# Altium PCB 装甲模块PCB.PcbDoc
Units mil, origin at the board's own origin, x right, y up, seen from the top; angles counter-clockwise.
Board outline 2335.03 x 900.03 mil, 2 copper layers (Top Layer, Bottom Layer); 36 components, 25 nets, 165 pads, 31 vias.
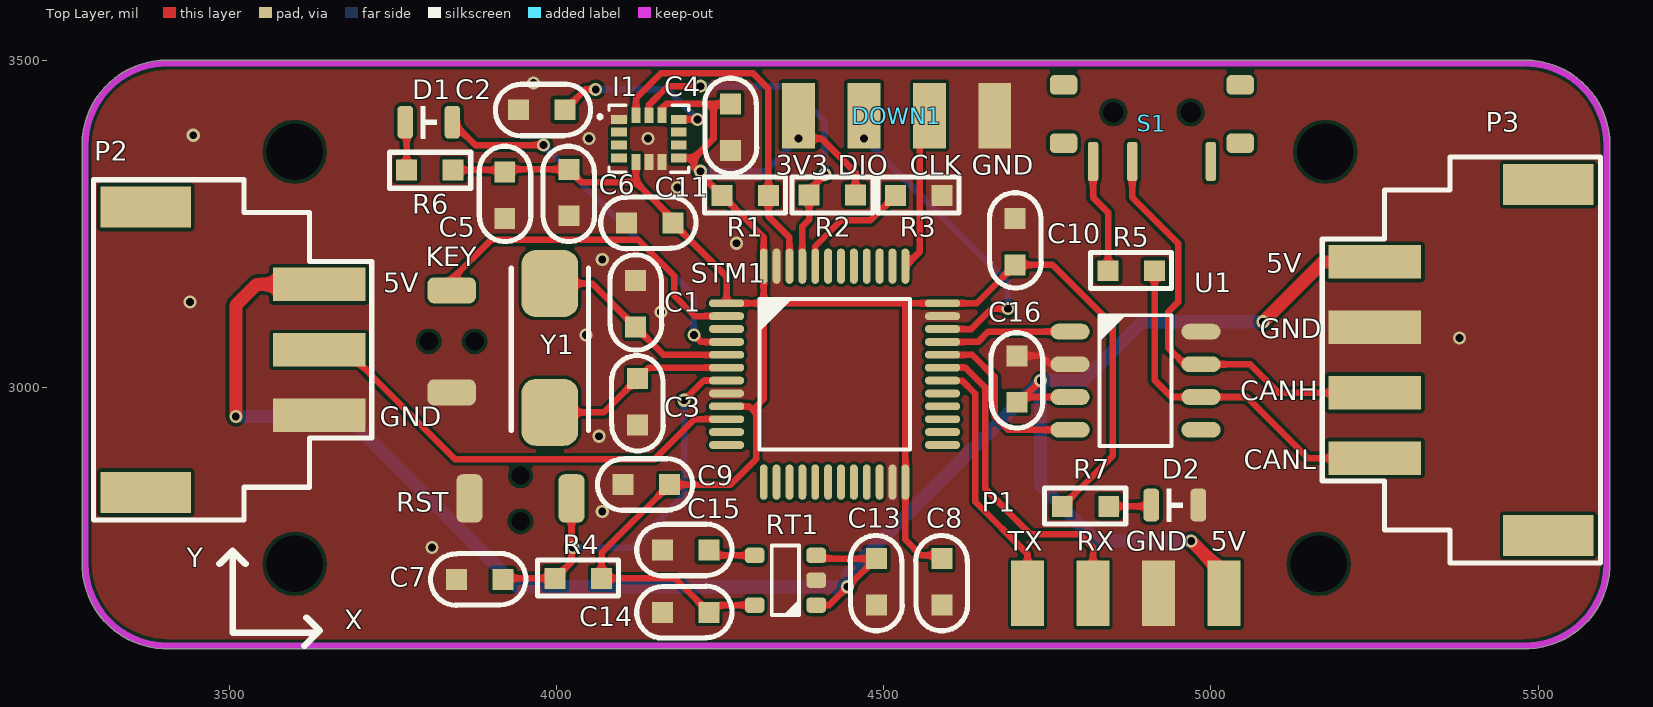
[diagram p0: Top Layer view]
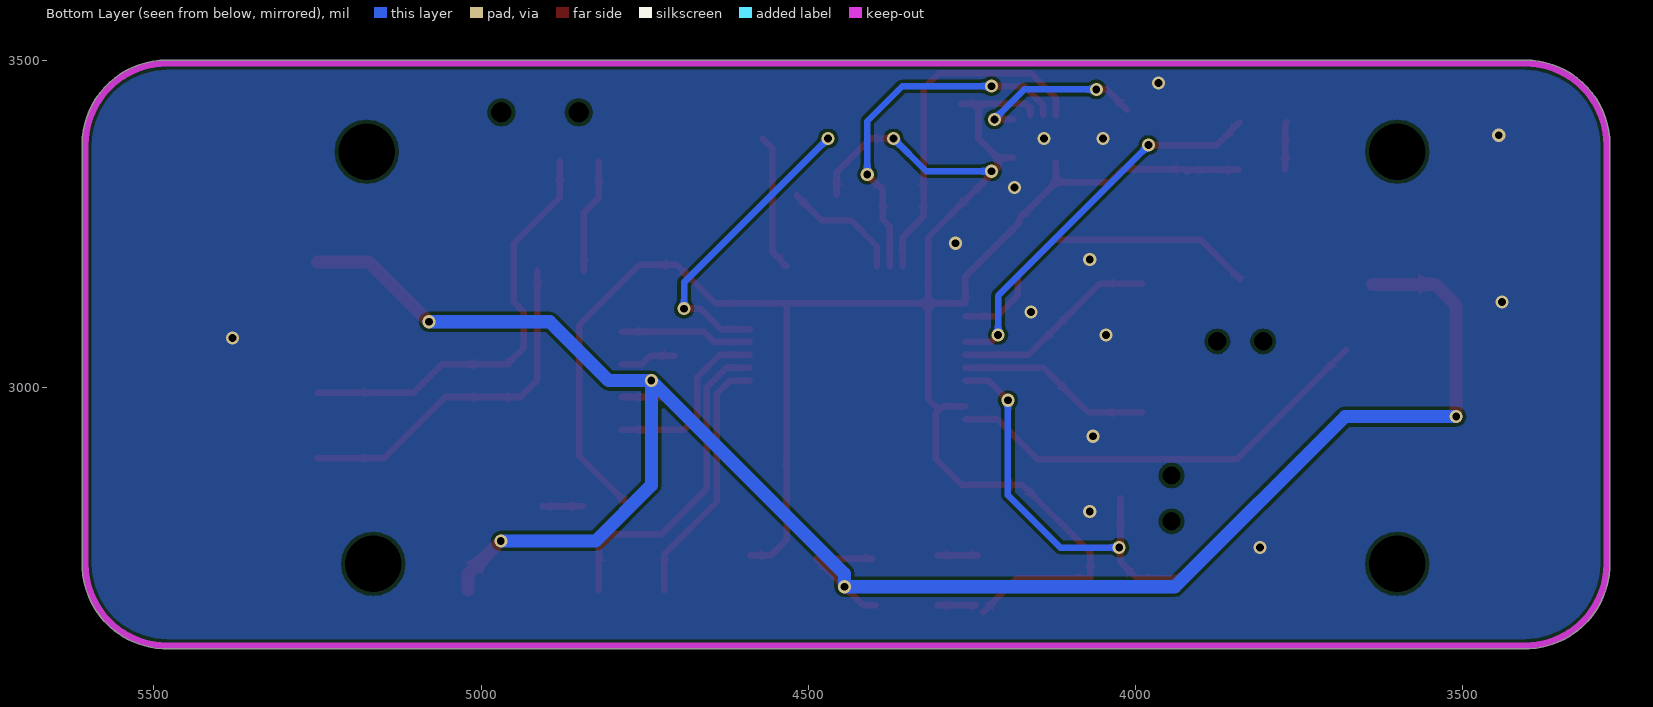
[diagram p1: Bottom Layer view, seen from below]
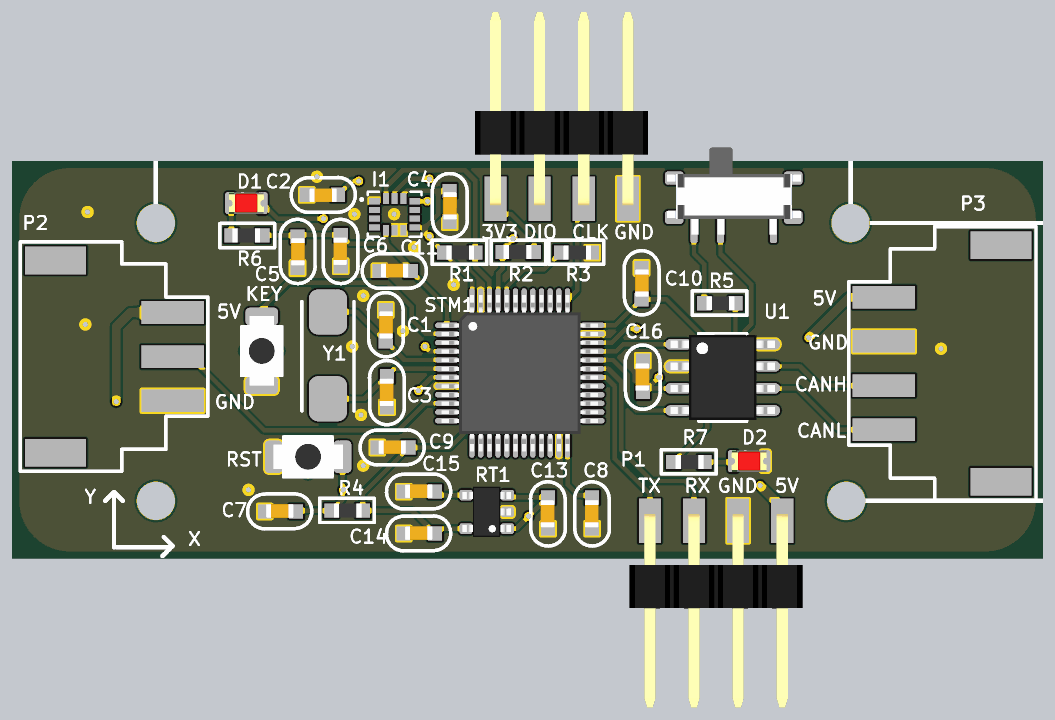
[diagram p2: 3D render of the assembled board from above, using the file's embedded part models]

## Layer stack, top to bottom
Top Solder: solder mask 0.4, Solder Resist, Dk 3.5
Top Layer: signal copper 1.4
Dielectric 1: dielectric 12.6, FR-4, Dk 4.8
Bottom Layer: signal copper 1.4
Bottom Solder: solder mask 0.4, Solder Resist, Dk 3.5

## Board outline
3275.13,2723.79 ccw(c3405,2730) 3398.79,2600.13 ccw(c3400,2605) 3400,2599.99 5485,2599.99 ccw(c5485,2605) 5486.21,2600.13 ccw(c5480,2730) 5609.87,2723.79 ccw(c5605,2725) 5610.02,2725 5610.02,3370 ccw(c5480,3370) 5480,3500.01 3405,3500.01 3405,3500.02 cw(c3405,3495) 3405.03,3500.01 3405,3500.02 ccw(c3405,3370) 3274.99,3370 3274.99,2725 ccw(c3280,2725)

## Design rules (kind name [scope] priority, off if disabled: settings)
Clearance [All] p1: gap=5 ignorepadtopadclearanceinfootprint=FALSE
PlaneConnect [All] p1: planeconnectstyle=Direct reliefexpansion=20 reliefentries=4 reliefconductorwidth=10 reliefairgap=10
PolygonConnect [All] p1: connectstyle=Direct reliefconductorwidth=10 reliefentries=4 polygonreliefangle="90 Angle" airgapwidth=10
RoutingVias [All] p1: holewidth=28 width=50 viastyle="Through Hole" minholewidth=28 minwidth=50 maxholewidth=28 maxwidth=50
SolderMaskExpansion [All] p1: expansion=4
Width [All] p1: maxlimit=100 minlimit=10 preferedwidth=10 minimp=50.000000 maximp=50.000000 favimp=50.000000
29 further rules are at their usual default settings.

## Components (designator, comment, footprint, x,y, rotation, side; value= is the part's Value field where it differs from the comment)
C1 "Cap" CAP_0603 4120,3130 r270 top value=20PF
C2 "Cap_0603" CAP_0603 3980,3425 r180 top value=0.1uF
C3 "Cap" CAP_0603 4125,2975 r90 top value=20PF
C4 "Cap_0603" CAP_0603 4265,3400 r270 top value=0.1uF
C5 "Cap_0603" CAP_0603 3920,3296 r270 top value=0.1uF
C6 "Cap_0603" CAP_0603 4020,3295 r90 top value=0.1uF
C7 "Cap_0603" CAP_0603 3880,2705 r0 top value=0.1u
C8 "Cap_0603" CAP_0603 4590,2700 r90 top value=0.1u
C9 "Cap_0603" CAP_0603 4135,2850 r0 top value=0.1u
C10 "Cap_0603" CAP_0603 4700,3225 r270 top value=0.1u
C11 "Cap_0603" CAP_0603 4140,3250 r0 top value=0.1u
C13 "Cap_0603" CAP_0603 4490,2700 r90 top value=1u
C14 "Cap_0603" CAP_0603 4195,2655 r0 top value=0.1u
C15 "Cap_0603" CAP_0603 4195,2750 r0 top value=22n
C16 "Cap_0603" CAP_0603 4705,3010 r90 top value=0.1u
D1 "LED_0805" LED_0805_RED 3805,3405 r0 top
D2 "LED_0805" LED_0805_RED 4945,2820 r0 top
DOWN1 "HDR1x4_2.54" HDR1X4_2.54_SMD 4520,3420 r90 top
I1 "ICM20600" ICM20600 4140,3380 r0 top
KEY "ButtonTACT_3x4x2_180" ButtonTACT_3x4x2_180H 3840,3070 r270 top
P1 "HDR1x4_2.54" HDR1X4_2.54_SMD 4870,2680 r270 top
P2 "HDR1x3_2.54" XH2.54_SMT_3PIN 3475,3035 r180 top
P3 "HDR1x4_2.54" XH2.54_SMT_4PIN 5395,3040 r0 top
R1 "Res_0603" RES_0603 4290,3375 r0 top value=10K
R2 "Res_0603" RES_0603 4420,3212 r180 top value=10K
R3 "RES_0603" RES_0603 4555,3375 r0 top value=10K
R4 "RES_0603" RES_0603 4035,2790 r0 top value=10K
R5 "RES_0603" RES_0603 4880,3260 r0 top value=120R
R6 "RES_0603" RES_0603 3805,3250 r180 top value=1K
R7 "RES_0603" RES_0603 4810,2900 r0 top value=1K
RST "ButtonTACT_3x4x2_180" ButtonTACT_3x4x2_180H 3945,2830 r0 top
RT1 "RT9193" SOT23-5 4350,2705 r180 top
S1 "SwitchSPDT_2.8x6.6_90" SwitchSPDT_2.8X6.6_90 4910,3420 r180 top
STM1 "STM32F103C" LQFP_P0.5_48 4425,3020 r0 top
U1 "TJA1050" SOP_E150_8 4885,3010 r0 top
Y1 "8M" Osc-6032 3990,3060 r270 top

## Footprints (in the part's own frame and the unit in brackets; to place one, negate y for a bottom-side part, rotate by r counter-clockwise, add the part's x,y. Pads: shape width x height; smd on the part's side, far side on the other; paste and mask are expansions set on the pad)
ButtonTACT_3x4x2_180H [mil]
  round 0 hole 28: 0(0,35) 0(0,-35)
  rrect50% 40x74 smd: 1(-78,0) 2(78,0)
  body extent -79,-49 79,49, height 63
CAP_0603 [mil]
  rect 32x32 smd: 1(-33,1) 2(38,1)
  silkscreen extent -72,-38 73,41, body extent -30,-14 33,18, height 31
HDR1X4_2.54_SMD [mil]
  rect 100x50 smd: 1(-5,150) 2(-5,50) 3(-5,-50) 4(-5,-150)
  body extent -20,-196 419,196, height 99
ICM20600 [mm]
  rect 0.61x0.35 smd: 1(-1.127,0.746) 2(-1.127,0.246) 3(-1.127,-0.254) 4(-1.127,-0.754) 8(1.193,-0.754) 9(1.193,-0.254) 10(1.193,0.246) 11(1.193,0.746)
  rect 0.35x0.61 smd: 5(-0.467,-0.914) 6(0.033,-0.914) 7(0.533,-0.914) 12(0.533,0.906) 13(0.033,0.906) 14(-0.467,0.906)
  silkscreen extent -1.94,-1.3 1.58,1.3
LED_0805_RED [mil]
  rrect50% 24x50 smd: 1(-36,0) 2(36,0)
  silkscreen extent -12,-24 12,24, body extent -40,-25 40,25, height 43
LQFP_P0.5_48 [mil]
  oval 54x12 smd: 1(-165,108.27) 2(-165,88.58) 3(-165,68.9) 4(-165,49.21) 5(-165,29.53) 6(-165,9.84) 7(-165,-9.84) 8(-165,-29.53) 9(-165,-49.21) 10(-165,-68.9) 11(-165,-88.58) 12(-165,-108.27) 25(165,-108.27) 26(165,-88.58) 27(165,-68.9) 28(165,-49.21) 29(165,-29.53) 30(165,-9.84) 31(165,9.84) 32(165,29.53) 33(165,49.21) 34(165,68.9) 35(165,88.58) 36(165,108.27)
  oval 12x54 smd: 13(-108.27,-165) 14(-88.58,-165) 15(-68.9,-165) 16(-49.21,-165) 17(-29.53,-165) 18(-9.84,-165) 19(9.84,-165) 20(29.53,-165) 21(49.21,-165) 22(68.9,-165) 23(88.58,-165) 24(108.27,-165) 37(108.27,165) 38(88.58,165) 39(68.9,165) 40(49.21,165) 41(29.53,165) 42(9.84,165) 43(-9.84,165) 44(-29.53,165) 45(-49.21,165) 46(-68.9,165) 47(-88.58,165) 48(-108.27,165)
  silkscreen extent -115,-115 115,115, body extent -177,-178 177,177, height 61
Osc-6032 [mm]
  rrect50% 2.6x2.2 smd: 1(2.5,0) 2(-2.5,0)
  silkscreen extent -3.1,-1.5 3.2,1.5
RES_0603 [mil]
  rect 32x32 smd: 1(-37,-82) 2(34,-82)
  silkscreen extent -64,-109 60,-54, body extent -31,-98 31,-66, height 18
SOP_E150_8 [mil]
  oval 60x24 smd: 1(-100,75) 2(-100,25) 3(-100,-25) 4(-100,-75) 5(100,-75) 6(100,-25) 7(100,25) 8(100,75)
  silkscreen extent -55,-100 55,100, body extent -118,-96 118,96, height 69
SOT23-5 [mil]
  rrect50% 30x24 smd: 1(-47,38) 2(-47,0) 3(-47,-38) 4(47,-38) 5(47,38)
  silkscreen extent -21,-53 21,53, body extent -55,-57 55,57, height 57
SwitchSPDT_2.8X6.6_90 [mil]
  rrect50% 42x30 smd: 0(-135,-42) 0(-135,47) 0(135,-42) 0(135,47)
  round 10 hole 31.5: 0(-59.06,0) 0(59.06,0)
  rrect50% 16x60 smd: 1(90,75) 2(30,75) 3(-90,75)
  body extent -152,-111 151,86, height 55
XH2.54_SMT_3PIN [mm]
  rect 3.5x1.6 smd: 0(2.608,4.978) 0(2.608,-6.102)
  rect 3.6x1.3 smd: 1(-4.133,1.978) 2(-4.133,-0.562) 3(-4.133,-3.102)
  silkscreen extent -6.16,-7.17 4.63,6.04
XH2.54_SMT_4PIN [mm]
  rect 3.5x1.6 smd: 0(3.067,-6.771) 0(3.067,6.849)
  rect 3.6x1.3 smd: 1(-3.674,-3.771) 2(-3.674,-1.231) 3(-3.674,1.309) 4(-3.674,3.849)
  silkscreen extent -5.71,-7.83 5.09,7.91

## Part data
C1 C3: library part Cap_1, "Capacitor", LatestRevisionDate=17-Jul-2002, LatestRevisionNote="Re-released for DXP Platform.", PackageReference=RAD-0.3, Published=8-Jun-2000, Publisher="Altium Limited"
C2 C4 C5 C6 C7 C8 C9 C10 C11 C13 C14 C15 C16: "Capacitor"
D1 D2: "LED"
DOWN1 P1 P2 P3: "Header"
KEY RST: "Button"
R1 R2: "Resistor"
R3 R4 R5 R6 R7: library part RES_0805, "Resistor"
RT1: "Power"
S1: "Switch"
STM1: "MCU"
Y1: library part C-Osc, "Crystal Oscillator", LatestRevisionDate=17-Jul-2002, LatestRevisionNote="Re-released for DXP Platform.", PackageDescription="Crystal, Thru-Hole; 2 Leads; Body 3.1 x 8.2 mm (Dia.xH)", PackageReference=R38, Published=8-Jun-2000, Publisher="Altium Limited"

## Free pads (board coordinates)
  round 60 hole 86.61: 6(3600,2730) 6(3600,3360) 6(5165,2730) 6(5175,3360)

## Via types
v1: diameter 20, hole 12, Top Layer to Bottom Layer, 31 vias

## Nets (pads, with @x,y where several pads share a name; then routed paths per layer and width w, separated by ;. In a path a pad name is that pad's centre, name@x,y a point inside that pad or via, vN(x,y) a via of type N, cw(c..) or ccw(c..) an arc to the next point about the centre after c; other vN are vias at no path point)
3V3: C4.1 C5.1 C6.2 C8.2 C9.2 C10.2 C11.2 C14.2 DOWN1.1 I1.5 I1.8 I1.12 R1.1 R2.1 R4.2 R6.1 R7.1 RT1.5 STM1.1 STM1.9 STM1.24 STM1.36 STM1.48 | length 3633.2
  Top Layer w10: R6.1 3918,3332 C5.1 3925,3333 C6.2 4038.63,3313.37 4121.63,3313.37 ; I1.5 4121.63,3313.37 ; I1.12 4161,3426 4168,3433 4240,3433 ; I1.8 4210.3,3350.3 ; C14.2 4181,2708 R4.2 4069,2747 C9.2 4266,2851 4305,2890 4305,2960 4300,2965 ; C14.2@4244,2667 RT1.5 ; STM1.9 4294.21,2970.79 4300,2965 ; C4.1 4240,3433 ; v1(4370,3380) 4405,3380 4457,3328 R2.1 ; 4533.27,3125 STM1.24 4533.27,2766.73 4557,2743 C8.2@4589,2743 ; R7.1 4850,2895 4850,3095 4758,3187 C10.2 4642.27,3128.27 STM1.36 4316.73,3128.27 ; 4121.63,3313.37 4178,3257 C11.2 4260,3169 STM1.1 4316.73,3128.27 ; 4210.3,3350.3 4210.3,3335.7 R1.1 4316.73,3229.27 STM1.48 4316.73,3128.27 ; 4210.3,3350.3 4240,3380 4240,3433 ; 4300,2965 4316.73,2981.73 4316.73,3128.27
  Bottom Layer w10: v1(4220,3330) 4320,3330 v1(4370,3380)
5V: C13.2 C16.1 P1.1 P2.3 P3.4 RT1.1 RT1.3 U1.3 | length 3223.5
  Top Layer w10: RT1.1 4417,2667 v1(4445,2695) 4488,2738 RT1.3@4402,2738 ; C16.1 4707,2977 C16.1@4715,2985 ; v1(4740,3010) C16.1@4715,2985 ; U1.3 C16.1@4715,2985
  Top Layer w20: v1(3510,2955) 3510,3125 3542.13,3157.13 P2.3 ; v1(4970,2765) 5020,2715 P1.1@5020,2690 ; v1(5080,3100) 5171.54,3191.54 P3.4
  Bottom Layer w20: v1(3510,2955) 3680,2955 3940,2695 v1(4445,2695) 4445,2715 v1(4740,3010) ; v1(4970,2765) 4825,2765 4740,2850 v1(4740,3010) ; v1(5080,3100) 4895,3100 4805,3010 v1(4740,3010)
BOOT0: R3.1 STM1.44 | length 185.1
  Top Layer w10: STM1.44 4395.47,3215.47 4435,3255 4480,3255 R3.1
CAN_RX: STM1.32 U1.4 | length 277.6
  Top Layer w10: STM1.32 4635.47,3049.53 4670,3015 4670,2955 4690,2935 U1.4
CAN_TX: STM1.33 U1.1 | length 201.5
  Top Layer w10: STM1.33 4644.21,3069.21 4660,3085 U1.1
CANH: P3.2 S1.2 U1.7 | length 663.9
  Top Layer w10: S1.2 4880,3290 4950,3220 4950,3130 4935,3115 4935,3060 4960,3035 U1.7 5060,3035 5103.46,2991.54 P3.2
CANL: P3.1 R5.2 U1.6 | length 552.8
  Top Layer w10: R5.2 4914,3011 4940,2985 U1.6 5055,2985 5148.46,2891.54 P3.1
GND: C1.1 C2.2 C3.1 C4.2 C5.2 C6.1 C7.1 C8.1 C9.1 C10.1 C11.1 C13.1 C14.1 C15.1 C16.2 D2.2 DOWN1.4 I1.1 I1.6 I1.7 KEY.2 P1.2 P2.1 P3.3 R3.2 RST.1 RT1.2 STM1.8 STM1.23 STM1.35 STM1.47 U1.2 U1.8 | length 86.4
  Top Layer w10: C16.2 4742,3048 4755,3035 U1.2
  other v1: 3810,2755 4070,2810 4065,2925 5380,3075 4045,3080 4160,3115 3440,3130 4070,3195 4275,3220 4185,3305 4050,3380 4140,3380 3445,3385 3965,3465
I2C1_SCL: I1.13 R2.2 STM1.45 | length 554.1
  Top Layer w10: I1.13 4141.31,3431.32 4170,3460 v1(4220,3460) ; STM1.45 4375.79,3245.79 4386,3256 R2.2 4386,3301 v1(4410,3325)
  Bottom Layer w10: v1(4220,3460) 4356.5,3460 4410,3406.5 v1(4410,3325)
I2C1_SDA: I1.14 R1.2 STM1.46 | length 538.5
  Top Layer w10: I1.14 4121.63,3441.63 4160,3480 4300,3480 4324,3456 R1.2 4324,3261 4356.1,3228.9 STM1.46
KEY1: KEY.1 STM1.2 | length 510.6
  Top Layer w10: KEY.1@3840,3165 3900,3225 4125,3225 4180,3170 4180,3140 4211.42,3108.58 STM1.2
LED: D1.2 STM1.4 | length 593.2
  Top Layer w10: D1.2 3876,3370 v1(3980,3370) ; v1(4210,3080) 4220.79,3069.21 STM1.4
  Bottom Layer w10: v1(3980,3370) 4210,3140 v1(4210,3080)
NetC1_2: C1.2 STM1.5 Y1.2 | length 315.1
  Top Layer w10: Y1.2 4054.57,3158.43 C1.2 4163.47,3049.53 STM1.5
NetC2_1: C2.1 I1.11 | length 263.1
  Top Layer w10: C2.1 4044,3455 v1(4060,3455) ; I1.11 v1(4215.65,3409.35)
  Bottom Layer w10: v1(4060,3455) 4170,3455 v1(4215.65,3409.35)
NetC3_2: C3.2 STM1.6 Y1.1 | length 298.3
  Top Layer w10: Y1.1 4072.57,2961.57 C3.2 4140.84,3029.84 STM1.6
NetC15_2: C15.2 RT1.4 | length 62
  Top Layer w10: C15.2@4241,2743 RT1.4
NetD1_1: D1.1 R6.2 | length 73.8
  Top Layer w10: D1.1 3771,3403 R6.2
NetD2_1: D2.1 R7.2 | length 63
  Top Layer w10: R7.2 D2.1@4907,2818
NetR5_1: R5.1 S1.1 | length 176.5
  Top Layer w10: S1.1 4820,3290 4843,3267 R5.1
RST: C7.2 R4.1 RST.2 STM1.7 | length 636
  Top Layer w10: C7.2@3920,2708 R4.1 4023,2733 RST.2 ; v1(4195,2980) 4225.16,3010.16 STM1.7
  Bottom Layer w10: v1(4025,2755) 4115,2755 4195,2835 v1(4195,2980)
SWCLK: DOWN1.3 STM1.37 | length 210.2
  Top Layer w10: STM1.37 4555,3206.73 4555,3365 DOWN1.3@4570,3380
SWDIO: DOWN1.2 STM1.34 | length 464
  Top Layer w10: STM1.34 4633.9,3088.9 4665,3120 v1(4690,3120)
  Bottom Layer w10: v1(4470,3380) 4690,3160 v1(4690,3120)
TIM2_CH1: P2.2 STM1.10 | length 676.7
  Top Layer w10: P2.2@3677.87,3057.13 3845,2890 4150,2890 4211.1,2951.1 STM1.10
U1_RX: P1.3 STM1.31 | length 499.6
  Top Layer w10: STM1.31 4625.16,3029.84 4655,3000 4655,2845 4725,2775 4800,2775 4820,2755 P1.3@4820,2690
U1_TX: P1.4 STM1.30 | length 391.5
  Top Layer w10: STM1.30 4619.84,3010.16 4640,2990 4640,2825 4720,2745 P1.4@4720,2690
pads on no net: I1.2 I1.3 I1.4 I1.9 I1.10 KEY.0 P2.0 P3.0 RST.0 S1.0 S1.3 STM1.3 STM1.11 STM1.12 STM1.13 STM1.14 STM1.15 STM1.16 STM1.17 STM1.18 STM1.19 STM1.20 STM1.21 STM1.22 STM1.25 STM1.26 STM1.27 STM1.28 STM1.29 STM1.38 STM1.39 STM1.40 STM1.41 STM1.42 STM1.43 U1.5

## Polygon pours and split planes (outlines as drawn)
GND on Top Layer "Top Layer-No Net" (solid, remove dead copper, pour order 0): 3215,3560 5825,3560 5875,3510 5795,3430 5795,2450 3210,2450 3160,2500
GND on Bottom Layer "Top Layer-No Net" (solid, remove dead copper, pour order 2): 3140,3630 3155,3615 5710,3615 5710,2690 5450,2430 3245,2430 3185,2490

## Keep-outs
Keep-Out Layer:
  lines w10: 3280,2725 3280,3370 cw(c3405,3370) 3405,3495 5480,3495 cw(c5480,3370) 5605,3370 5605,2725 ; 3280,2730 ccw(c3405,2730) 3405,2605 ; 3400,2605 5485,2605 ; 5480,2605 ccw(c5480,2730) 5605,2730

## Silkscreen, mask and mechanical layers (free items; w line width, h text height)
Top Overlay:
  lines w10: 3485,2730 3505,2750 ; 3505,2625 3505,2750 ; 3510,2625 3635,2625 3615,2605 ; 3525,2730 3505,2750 ; 3618,2648 3638,2628
  text "3V3" at 4335,3325 h30
  text "DIO" at 4430,3325 h30
  text "CLK" at 4540,3325 h30
  text "GND" at 4635,3325 h30
  text "5V" at 5085,3175 h30
  text "5V" at 3735,3145 h30
  text "GND" at 5075,3075 h30
  text "CANH" at 5045,2980 h30
  text "GND" at 3730,2940 h30
  text "CANL" at 5050,2875 h30
  text "TX" at 4690,2750 h30
  text "RX" at 4795,2750 h30
  text "GND" at 4870,2750 h30
  text "5V" at 5000,2750 h30
  text "Y" at 3435,2725 h30
  text "X" at 3705,2660 h30 r180

## Dimensions
5175,3360 to 3600,3360 on Top Overlay
5175,3360 to 5165,2730 on Top Overlay